# EAGLE board i2c_adc_avr_inline_soic (EAGLE 6.4)
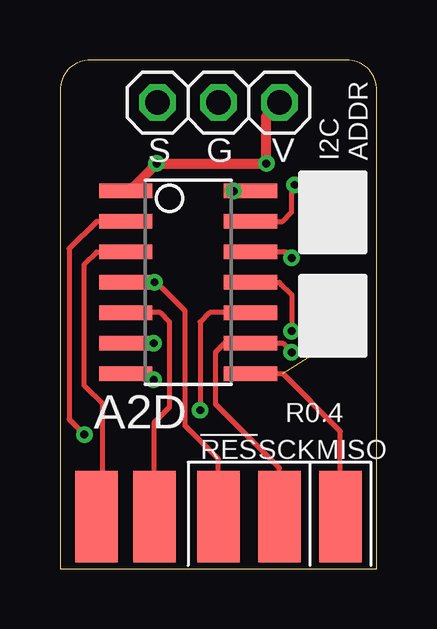
[diagram p0: board, top side]
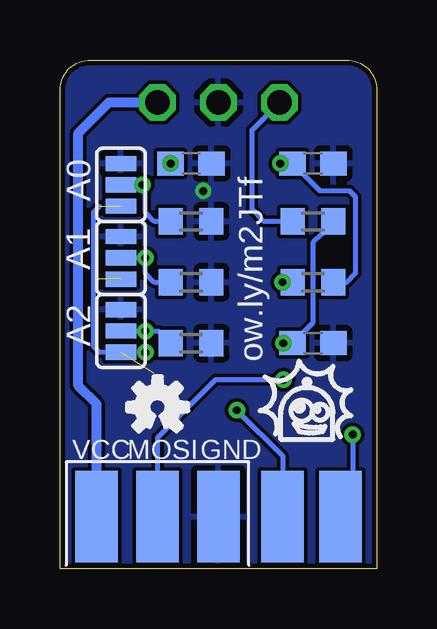
[diagram p1: board, bottom side, seen from below]

Size 13.21 x 21.21 mm. Coordinates in mm from the lower left corner, seen from the top.
Outline: 13.21,0 13.21,19.94 arc90 11.94,21.21 1.27,21.21 arc90 0,19.94 0,0 13.21,0
Copper layers (1*16): Top 0.0356mm / dielectric 1.5011mm / Bottom 0.0356mm
Design rules "default *": minimum track width 6mil, minimum drill 13mil, track to track 6mil, track to pad 6mil, pad to pad 6mil, via to via 6mil, smd to smd 6mil, copper to edge 8mil, drill to drill 6mil, minimum pad ring 7mil, minimum via ring 7mil, stop-mask expansion 4mil, vias tented up to drill 20mil, thermal gap 10mil

## Footprints (pad centres in the part's own frame; a part is rotated, then mirrored left to right if it is on the bottom)
SJ_3 = smd 0.635 x 1.27: 1 -0.889,0; 2 0,0; 3 0.889,0
C0603 = smd 1.1 x 1: 1 -0.85,0; 2 0.85,0
SOIC14 = smd 0.61 x 2.21: 1 -3.81,-2.603; 2 -2.54,-2.603; 3 -1.27,-2.603; 4 0,-2.603; 5 1.27,-2.603; 6 2.54,-2.603; 7 3.81,-2.603; 8 3.81,2.603; 9 2.54,2.603; 10 1.27,2.603; 11 0,2.603; 12 -1.27,2.603; 13 -2.54,2.603; 14 -3.81,2.603
2X3_2LAYER = smd 1.778 x 3.81: !RES -2.54,0; MISO 2.54,0; SCK 0,0 | smd 1.778 x 3.81 bottom: GND -2.54,0; MOSI 0,0; VCC 2.54,0
1X03-S = drill 1.016 octagon: 1 -2.54,0; 2 0,0; 3 2.54,0
R0603 = smd 1 x 1.1: 1 -0.85,0; 2 0.85,0
PAD0.07X0.15 = smd 1.778 x 3.81: P$1 0,0

## Placement (x,y rotation side)
A0  [SJ_3]  10.67,16 270 bottom
A1  [SJ_3]  10.67,12.95 270 bottom
A2  [SJ_3]  10.67,9.91 270 bottom
C2  104  [C0603]  2.67,16.89 0 bottom
C3  102  [C0603]  2.67,9.4 0 bottom
C4  106  [C0603]  7.75,16.89 0 bottom
IC1  TINY24/44/84-SSU  [SOIC14]  5.33,11.94 270 top
J1  AVRISP62LAYER  [2X3_2LAYER]  9.14,2.16 0 top
JP8  SENS  [1X03-S]  6.6,19.43 0 top
R0  220K  [R0603]  7.75,14.48 180 bottom
R1  220K  [R0603]  7.75,11.94 180 bottom
R2  220K  [R0603]  7.75,9.4 180 bottom
R3  10K  [R0603]  2.67,11.94 0 bottom
R4  10K  [R0603]  2.67,14.48 180 bottom
X1  PB2  [PAD0.07X0.15]  3.94,2.16 0 top
X2  !SS  [PAD0.07X0.15]  1.52,2.16 0 top
X3  PB0  [PAD0.07X0.15]  1.52,2.16 0 bottom
X4  PA3  [PAD0.07X0.15]  3.94,2.16 0 bottom

## Library data of the parts
A0 = SparkFun; DATABASE: ./../../eagle/PARTSDB.TXT
A1 A2 = SparkFun
C2 = rcl; PARTNO: C1608X7R1E104K080AA
C3 = rcl; CODE: 102; PARTNO: CL10B102KB8SFNC
C4 = rcl; PARTNO: CL10A106MP8NNNC
IC1 = avr-7
J1 = mes_avr
JP8 = pinhead-2
R0 R1 R2 = rcl; PARTNO: RC1608J224CS
R3 R4 = rcl; PARTNO: 1622829-1
X1-X4 = mes_electromech

## Nets
!RESET: IC1.4 J1.!RES R3.1
!SS: IC1.3 X2.P$1
A0: A0.2 IC1.13 R0.2
A1: A1.2 IC1.12 R1.2
A2: A2.2 IC1.11 R2.2
AIN: C3.1 IC1.6 R4.1
GND: A0.1 A1.1 A2.1 C2.2 C3.2 C4.2 IC1.14 J1.GND JP8.2 R0.1 R1.1 R2.1
N$1: JP8.1 R4.2
N$5: IC1.10 X4.P$1
N$6: IC1.2 X3.P$1
N$7: IC1.5 X1.P$1
RX/SDA/MOSI: IC1.7 J1.MOSI
SCL/SCK: IC1.9 J1.SCK
TX/MISO: A0.3 A1.3 A2.3 IC1.8 J1.MISO
VCC: C2.1 C4.1 IC1.1 J1.VCC JP8.3 R3.2

## Tracks (layer width: path | path; a pad name or v marks a point on that pad's centre or on a via)
!RESET  (via drill 0.33)
  Top 0.203: v3.94,11.94 IC1.4 4.03,11.94 5.21,10.76 5.21,5.97 6.6,4.57 J1.!RES
  Bottom 0.203: R3.1 v3.94,11.94
!SS
  Top 0.203: X2.P$1 1.52,3.17 1.78,3.43 1.78,6.86 1.02,7.62
  Top 0.217: 1.02,7.62 1.02,12.7 1.52,13.21 IC1.3
A0  (via drill 0.33)
  Top 0.203: IC1.13 9.27,14.48 9.65,14.86 9.65,15.88 v9.78,16
  Bottom 0.203: R0.2 9.27,14.48 9.65,14.86 9.65,15.88 v9.78,16 A0.2
A1  (via drill 0.33)
  Top 0.203: v9.65,12.95 9.4,13.21 IC1.12
  Bottom 0.203: R1.2 9.27,11.94 9.65,12.32 v9.65,12.95 A1.2
A2  (via drill 0.33)
  Top 0.203: IC1.11 9.14,11.94 9.65,11.43 v9.65,9.91
  Bottom 0.203: A2.2 v9.65,9.91 9.11,9.91 R2.2
AIN  (via drill 0.33)
  Top 0.203: IC1.6 v3.9,9.4
  Bottom 0.203: R4.1 2.33,13.93 2.67,13.59 2.67,10.25 C3.1 v3.9,9.4
GND  (via drill 0.33)
  Top 0.406: IC1.14 v7.24,15.75
  pour Bottom: 0,0 0,19.94 arc-90 1.27,21.21 11.94,21.21 arc-90 13.21,19.94 13.21,0
N$1
  Bottom 0.203: R4.2 4.7,14.48 5.21,14.99 5.21,18.29 JP8.1
N$5  (via drill 0.33)
  Top 0.203: IC1.10 6.22,10.67 5.84,10.29 v5.84,6.6
  Bottom 0.203: v5.84,6.6 3.94,4.7 X4.P$1
N$6  (via drill 0.33)
  Top 0.203: IC1.2 1.52,14.48 0.38,13.34 0.38,6.22 v1.02,5.59
  Bottom 0.203: v1.02,5.59 1.02,2.79 X3.P$1
N$7
  Top 0.203: X1.P$1 3.94,6.1 4.57,6.73 4.57,10.29 4.19,10.67 IC1.5
RX/SDA/MOSI  (via drill 0.33)
  Top 0.203: IC1.7 3.68,8.13 v3.9,7.87
  Bottom 0.203: v3.9,7.87 6.73,7.87 7.87,6.73
  Bottom 0.217: J1.MOSI 9.14,5.46 7.87,6.73
SCL/SCK  (via drill 0.33)
  Top 0.203: 9.14,4.19 6.48,6.86 6.48,9.02 6.86,9.4 IC1.9 9.27,9.4 v9.65,9.02
  Top 0.217: J1.SCK 9.14,4.19
TX/MISO  (3 unrouted)
  Top 0.203: IC1.8 9.27,8.13 11.68,5.71 J1.MISO
  Bottom 0.203: A2.3 11.56,9.02 11.81,9.27 11.81,12.19 | 11.81,12.19 11.81,14.86 11.56,15.11 | 11.68,12.06 11.81,12.19
VCC  (via drill 0.33)
  Top 0.203: IC1.1 2.37,15.75
  Top 0.406: 2.37,15.75 2.88,15.75 v4.03,16.89 C4.1 8.6,18.88 JP8.3
  Bottom 0.203: v4.03,16.89 C2.1 2.37,15.75 1.14,15.75 0.89,15.49 0.89,12.32 1.27,11.94 R3.2
  Bottom 0.406: J1.VCC 11.68,6.86 12.45,7.62 12.45,18.16 11.18,19.43 JP8.3
  other vias: 8.6,16.89

## Text on the board
tPlace: I2C / ADDR | R0.4
bPlace: ow.ly/m2JTf
tNames: S | G | V | A2D
tsilk: S | G | V | I2C / ADDR | A2D | R0.4 | !RES | SCK | MISO | !SS | PB2
bsilk: 104 | 106 | 10K | 220K | A0 | 10K | 220K | A1 | 102 | 220K | ow.ly/m2JTf | A2 | GND | MOSI | VCC | PB0 | PA3